# Altium PCB 滑板车模块-20718.PcbDoc
Units mil, origin at the board's own origin, x right, y up, seen from the top; angles counter-clockwise.
Board outline 2150 x 1000 mil, 2 copper layers (Top Layer, Bottom Layer); 31 components, 25 nets, 107 pads, 132 vias.
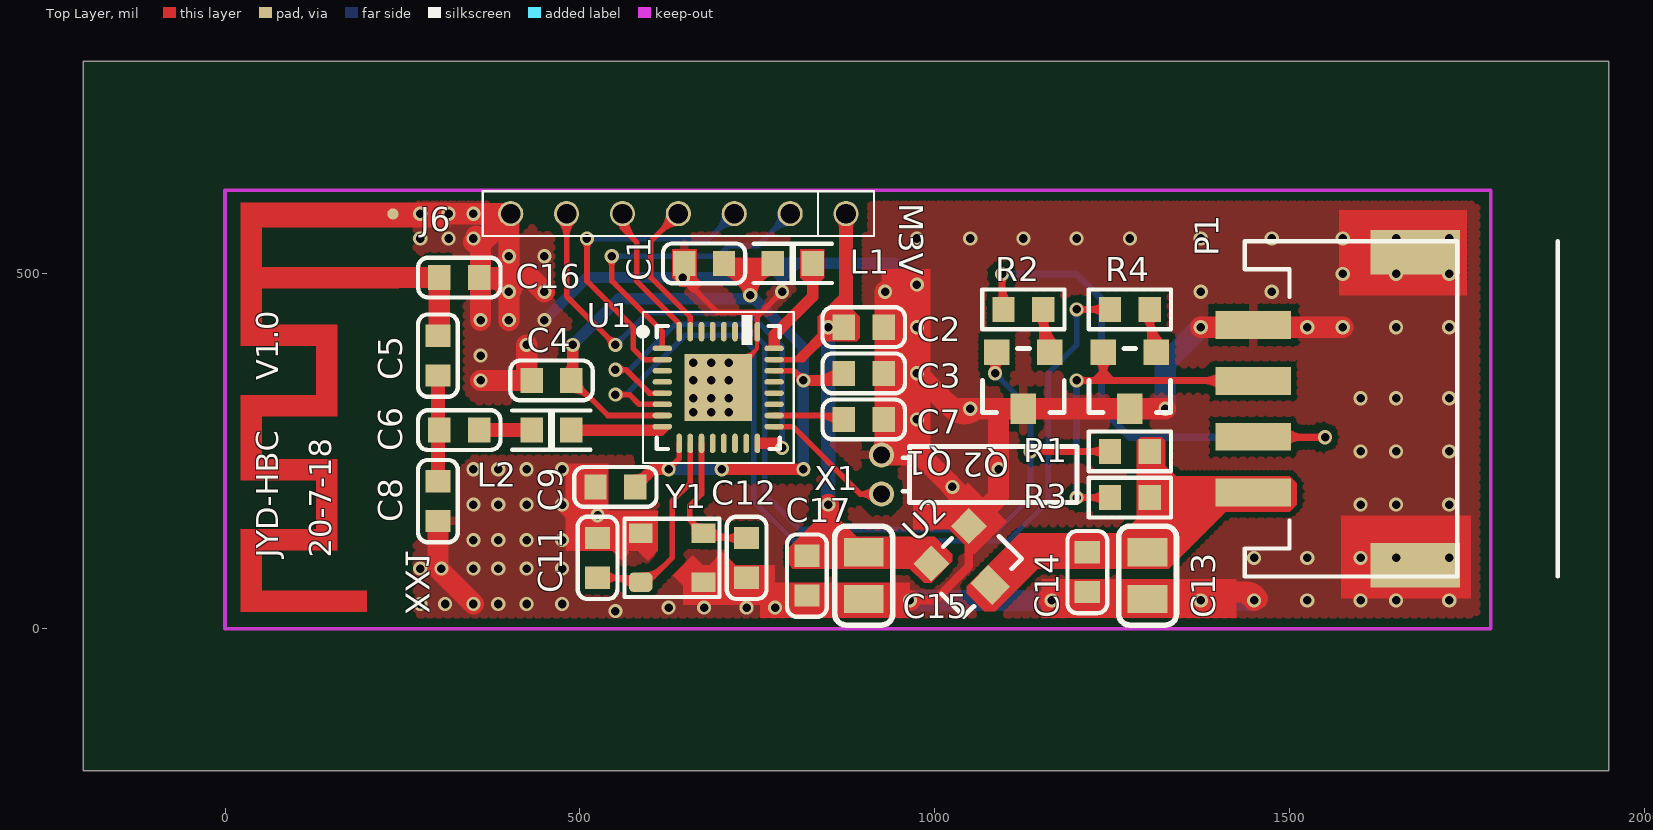
[diagram p0: Top Layer view]
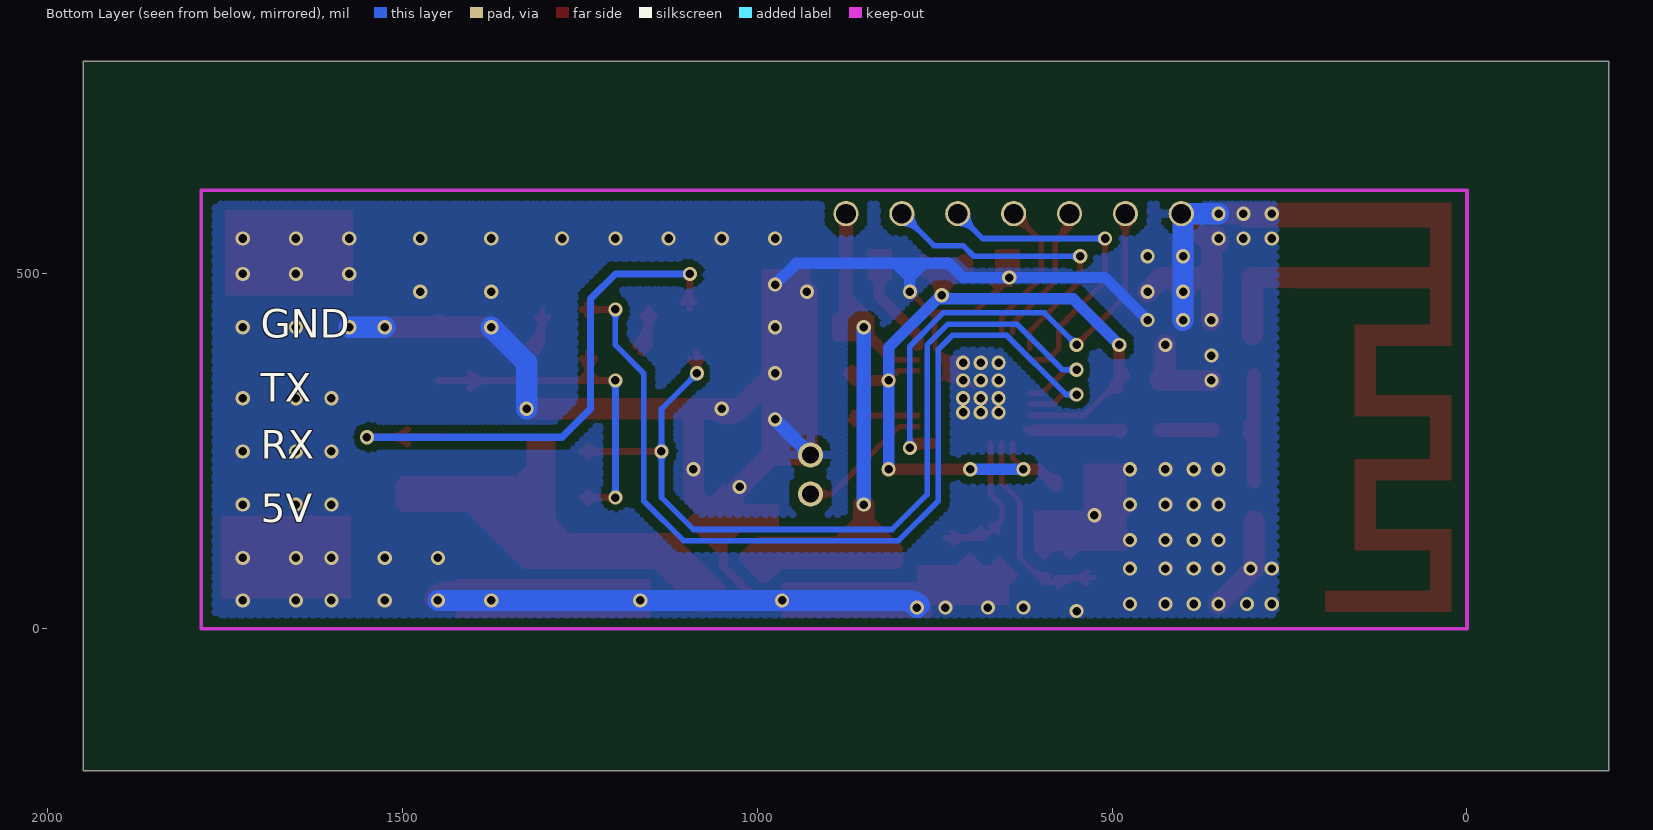
[diagram p1: Bottom Layer view, seen from below]
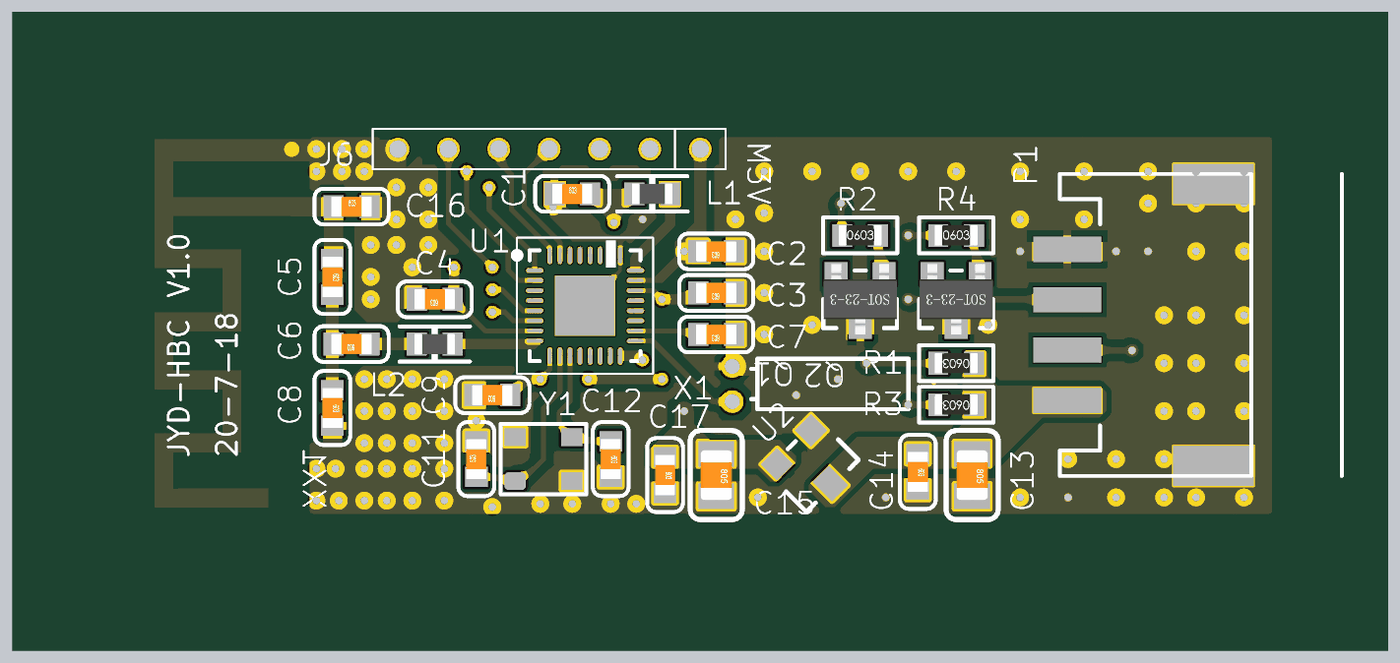
[diagram p2: 3D render of the assembled board from above, using the file's embedded part models]

## Layer stack, top to bottom
Top Layer: signal copper 1.4
Dielectric: dielectric 12.6, FR-4, Dk 4.8
Bottom Layer: signal copper 1.4

## Board outline
-200,800 -200,-200 1950,-200 1950,800

## Design rules (kind name [scope] priority, off if disabled: settings)
Clearance Clearance_1 [(IsWire)or(IsThruPin)or(IsFill)or(InPolygon)or(IsKeepOut) vs (InPolygon)or(IsKeepOut)] p1: gap=12
Clearance [All] p2: gap=7.87
ComponentClearance [All] p1: gap=0 collisioncheckmode=3 verticalgap=0 showdistances=FALSE
DiffPairsRouting [All] p1: maxlimit=80 minlimit=6 mostfreqgap=7.87 maxuncoupledlength=500
FabricationTestpoint [(IsPad And (OnTopLayer Or OnBottomLayer))] p1: side=3 testpointundercomponent=TRUE minsize=40 maxsize=100 preferedsize=60 minholesize=0 maxholesize=40 preferedholesize=32 testpointgrid=1 allowsidetop=TRUE allowsidebottom=TRUE usegrid=TRUE gridtolerance=0.01
HoleToHoleClearance [All] p1: gap=0 allowstackedmicrovias=TRUE
MinimumSolderMaskSliver [All] p1: minsoldermaskwidth=0
PolygonConnect PolygonConnect_1 [isvia] p1: connectstyle=Direct reliefconductorwidth=10 reliefentries=4 polygonreliefangle="90 Angle" airgapwidth=10
PolygonConnect [All] p2: connectstyle=Relief reliefconductorwidth=12 reliefentries=4 polygonreliefangle="90 Angle" airgapwidth=10
RoutingVias [All] p1: holewidth=11.81 width=19.68 viastyle="Through Hole" minholewidth=11.81 minwidth=19.68 maxholewidth=11.81 maxwidth=19.68
SilkToSilkClearance [All] p1: silktosilkclearance=0
SilkToSolderMaskClearance [IsPad] p1: minsilkscreentomaskgap=0 clearancetoexposedcopper=TRUE
SolderMaskExpansion [All] p1: expansion=4
Width [All] p1: maxlimit=80 minlimit=5 preferedwidth=10
21 further rules are at their usual default settings.

## Classes and differential pairs
differential pair TXRX: +TXD -RXD
differential pair TAX: +NetC12_1 -NetC11_1

## Components (designator, comment, footprint, x,y, rotation, side; value= is the part's Value field where it differs from the comment)
C1 "4.7uF/10V" 0603C 675,515 r0 top
C2 "1uF/10V" 0603C 900,425 r180 top
C3 "1uF/6.3" 0603C 900,360 r180 top
C4 "1uF/6.3V" 0603C 460,350 r180 top
C5 "0R" 0603C 300,385 r270 top
C6 "1pF" 0603C 330,280 r180 top
C7 "100nF" 0603C 900,295 r180 top
C8 "1.0pF/NP" 0603C 300,180 r270 top
C9 "100nF" 0603C 550,200 r180 top
C11 "5.6pF" 0603C 525,100 r90 top
C12 "5.6pF" 0603C 735,100 r270 top
C13 "47uF/16V" 0805C 1300,75 r270 top
C14 "100nF" 0603C 1215,80 r270 top
C15 "47uF/10V" 0805C 900,75 r270 top
C16 "NP" 0603C 330,495 r0 top
C17 "100nF" LC-0603_C 820,75 r270 top
J6 "7P" 7P-2.0MM 875,585 r180 top
L1 "2.2uH" 0603L 800,515 r180 top
L2 "2nH" 0603L 460,280 r0 top
P1 "Header 4" S4B-PH-SM3-TB 1500,310 r90 top
Q1 "2N3906" SOT-23-3 1125,350 r180 top
Q2 "2N3906" SOT-23-3 1275,350 r180 top
R1 "20K" 0603R 1275,250 r180 top
R2 "10K" 0603R 1125,450 r0 top
R3 "10K" 0603R 1275,185 r180 top
R4 "20K" 0603R 1275,450 r0 top
U1 "BK3432" QFN32_4*4*0.4 695,340 r0 top
U2 "HT7533-1" SOT-23-3L 1050,90 r225 top
X1 "32.768KHZ" 晶振-9 925,245 r270 top
XX1 "TIANX" ANT_L_TYPEA_MIRROR 240,495 r270 top
Y1 "16MHz" SMT-3225 630,100 r0 top

## Footprints (in the part's own frame and the unit in brackets; to place one, negate y for a bottom-side part, rotate by r counter-clockwise, add the part's x,y. Pads: shape width x height; smd on the part's side, far side on the other; paste and mask are expansions set on the pad)
7P-2.0MM [mm]
  round 0.9 hole 0.7 mask+0.05: 1(0,0) 2(2,0) 3(4,0) 4(6,0) 5(8,0) 6(10,0) 7(12,0)
  silkscreen extent -1,-0.8 13,0.8
0603C [mm]
  rect 0.8x0.9 smd: 1(-0.711,0) 2(0.711,0)
  silkscreen extent -1.47,-0.71 1.47,0.71, body extent -0.8,-0.4 0.8,0.4, height 0.3
0603L [mm]
  rect 0.8x0.9 smd: 1(-0.711,0) 2(0.711,0)
  silkscreen extent -1.4,-0.7 1.4,0.7, body extent -0.82,-0.41 0.83,0.41, height 0.46
0603R [mm]
  rect 0.8x0.9 smd: 1(-0.711,0) 2(0.711,0)
  silkscreen extent -1.47,-0.71 1.47,0.71, body extent -0.85,-0.4 0.85,0.4, height 0.56
0805C [mil]
  rect 40x56 smd: 1(-33,0) 2(33,0)
  silkscreen extent -70,-41 70,41, body extent -39,-25 39,25, height 30
ANT_L_TYPEA_MIRROR [mm]
  round 0.4 smd paste-0.2: 2(-2.278,-0.087)
  Top Layer region: 0.377,0.114 -0.377,0.114 -0.377,-4.786 -1.796,-4.786 -1.796,0.114 -2.677,0.114 -2.677,-5.54 2.45,-5.54 2.45,-2.84 4.207,-2.84 4.207,-5.54 7.261,-5.54 7.261,-2.84 9.007,-2.84 9.007,-5.54 11.961,-5.54 11.963,-1.016 11.201,-1.016 11.207,-4.786 9.761,-4.786 9.761,-2.086 6.507,-2.086 6.507,-4.786 4.961,-4.786 4.961,-2.086 1.696,-2.086 1.696,-4.786 0.377,-4.786
LC-0603_C [mm]
  rect 0.8x0.9 smd: 1(-0.711,0) 2(0.711,0)
  silkscreen extent -1.47,-0.71 1.47,0.71, body extent -0.8,-0.4 0.8,0.4, height 0.3
QFN32_4*4*0.4 [mm]
  rect 2.4x2.4 smd paste-0.025 mask+0.051: 0(0,0)
  oval 0.7x0.2 smd paste-0.025 mask+0.051: 1(-2,1.4) 2(-2,1) 3(-2,0.6) 4(-2,0.2) 5(-2,-0.2) 6(-2,-0.6) 7(-2,-1) 8(-2,-1.4) 17(2,-1.4) 18(2,-1) 19(2,-0.6) 20(2,-0.2) 21(2,0.2) 22(2,0.6) 23(2,1) 24(2,1.4)
  oval 0.2x0.7 smd paste-0.025 mask+0.051: 9(-1.4,-2) 10(-1,-2) 11(-0.6,-2) 12(-0.2,-2) 13(0.2,-2) 14(0.6,-2) 15(1,-2) 16(1.4,-2) 25(1.4,2) 27(0.6,2) 28(0.2,2) 29(-0.2,2) 30(-0.6,2) 31(-1,2) 32(-1.4,2)
  oval 0.2x0.7 on Top Overlay paste-0.025 mask+0.051: 26(1,2)
  silkscreen extent -2.82,-2.7 2.7,2.7
S4B-PH-SM3-TB [mm]
  rect 1x2.7 smd mask+0.05: 1(-3,1.3) 2(-1,1.3) 3(1,1.3) 4(3,1.3)
  rect 1.6x3.2 smd mask+0.05: A(-5.6,-4.5) B(5.6,-4.5)
  silkscreen extent -6,-9.6 6,1.6
SMT-3225 [mm]
  rrect50% 0.85x0.7 smd: 1(-1.125,-0.875)
  rect 0.85x0.7 smd: 2(1.125,-0.875) 3(1.125,0.875) 4(-1.125,0.875)
  silkscreen extent -1.7,-1.4 1.7,1.4
SOT-23-3 [mil]
  rect 36x36 smd: 1(-37.4,-40) 2(37.4,-40)
  rect 36x43.31 smd: 3(0,40)
  silkscreen extent -57,-45 58,45, body extent -57,-55 57,55, height 47
SOT-23-3L [mil]
  rect 36x36 smd: 1(-37.4,-40) 2(37.4,-40)
  rect 36x43.31 smd: 3(0,40)
  silkscreen extent -57,-45 58,45
晶振-9 [mm]
  round 0.9 hole 0.6: 1(0,0) 2(1.4,0)
  rect 0x0 smd: 3(0.635,8)
  silkscreen extent -0.3,0.76 1.7,7

## Part data
C1 C2 C3 C4 C5 C6 C7 C8 C9 C11 C12 C16: library part CAP0603
C13 C15: library part CAP-P, "Capacitor, tolerance ±20%"
C14: library part "CAP NP"
C17: library part CAP-NP, "Capacitor, Ceramic"
L1 L2: "Power Inductor, 4.7uH, 0.7A, 260mR DCR"
P1: "Header, 4-Pin"
Q1 Q2: "PNP General Purpose Amplifier"
R1 R2 R3 R4: library part Res1, "Resistor"
U2: library part XC6206P302M
X1: "Crystal, 24MHz, HC49/US SMD, Fundamental, 18pF, Tol. ?0ppm, Stab. ?0ppm"
Y1: library part OSCILATOR_0

## Via types
v1: diameter 20, hole 12, Top Layer to Bottom Layer, 116 vias
v2: diameter 20, hole 12, Top Layer to Bottom Layer, tented both sides, 16 vias

## Nets (pads, with @x,y where several pads share a name; then routed paths per layer and width w, separated by ;. In a path a pad name is that pad's centre, name@x,y a point inside that pad or via, vN(x,y) a via of type N, cw(c..) or ccw(c..) an arc to the next point about the centre after c; other vN are vias at no path point)
DC5V: C13.1 C14.1 P1.1 R1.1 R3.1 U2.3 | length 665.6
  Top Layer w20: C13.1@1292.93,115.07 ccw(c1268.62,139.38) 1303,139.38 ; C13.1@1303,111 R3.1 R1.1
  Top Layer w30: U2.3 1124.57,108 C14.1 C13.1 ; C13.1@1303,111 C13.1 ; C13.1@1308,108 C13.1 ; C13.1@1308,113 ccw(c1308,149.21) 1333.61,123.61 ; 1384.37,174.37 cw(c1415.35,143.39) P1.1@1415.35,187.2 ; P1.1 1401.89,191.89 1318,108 C13.1
GND: C1.1 C2.1 C3.1 C4.2 C5.1 C7.1 C8.2 C9.2 C11.2 C12.2 C13.2 C14.2 C15.2 C16.1 C16.2 C17.2 J6.7 P1.4 P1.A P1.B Q1.3 Q2.3 U1.0 U1.25 U2.1 X1.1 XX1.2 Y1.2 Y1.4 | length 6631.5
  Top Layer w5: U1.0@700.66,345.66 cw(c706.51,339.82) U1.0@709.19,347.64 ; U1.0@700.73,345.73 ccw(c696.46,350) U1.0@702.5,350 ; U1.0@702.8,368.7 ccw(c710.5,397.07) 731.29,376.29 ccw(c752.07,355.5) U1.0@723.7,347.8 ; U1.0@704.11,373.53 ccw(c713.11,406.66) 737.39,382.39 ccw(c761.66,358.11) U1.0@728.53,349.11 ; U1.0@705.42,378.35 ccw(c715.71,416.26) 743.48,388.48 ccw(c771.26,360.71) U1.0@733.35,350.42 ; U1.0@706.73,383.18 ccw(c718.32,425.85) 749.58,394.58 ; U1.0@707.56,342.91 ccw(c703.61,331.39) U1.0 749.59,394.59 ; U1.0@708.23,373.24 ccw(c719.26,384.19) U1.0@719.2,368.65 ; U1.0@708.24,376.77 cw(c723.64,361.27) U1.0@723.71,383.12 ; U1.0@710,357.5 ccw(c710,363.54) U1.0@714.27,359.27 ; U1.0@711.76,373.23 cw(c724.05,360.86) U1.0@724.11,378.29 ; U1.0@712.5,350 cw(c730.61,350) U1.0@717.8,362.8 ; U1.0@715.32,380.29 ccw(c720.08,385.01) U1.0@720.06,378.3 ; U1.0@717.5,350 cw(c747.68,350) U1.0@726.34,371.34 ; U1.0@738.18,351.73 cw(c780.85,363.32) 749.58,394.58 ; 749.59,404.14 cw(c754.87,404.14) U1.25@751.13,407.88 ; U1.25 749.59,418.21 749.59,394.59
  Top Layer w7.87: v1(645,495) 694.11,445.89 745,445.89 ; U1.25@750.12,406.48 U1.25@750.12,417.67 ; U1.25 750.12,440.12 ; v2@778.94,475 cw(c764.3,475) 774.65,464.65 cw(c785,454.3) v2@785,468.94 ; v2(785,475) 755.89,445.89 ; 745,445.89 750.12,440.78 750.12,440.12 ; 745,445.89 755.89,445.89 ; 750.12,440.12 755.89,445.89
  Top Layer w12: v1(965,40) 1000,40 1048.16,88.16 U2.1 ; U2.1@1039.68,136.25 cw(c1019.19,115.76) 1048.16,115.76 cw(c1077.13,115.76) U2.1@1056.65,136.25
  Top Layer w19.68: v1(645,495) 645,513 C1.1 ; X1.1 X1.1@928,248 ; C7.1 930,295 v1(975,295) ; C3.1 930,360 v1(975,360) ; C2.1 930,425 v1(975,425)
  Top Layer w20: v1(475,175) 515.55,134.45 C11.2@522,134.45 ; 522,144.37 ccw(c539.4,144.37) C11.2@527.1,132.06 ; C9.2 C11.2@522,134.45 ; C11.2 522,131 C11.2@522,134.45 ; C11.2@531.03,123.94 cw(c556.41,98.55) 556.41,134.45 ; Y1.4 C11.2@522,134.45 ; v1(675,30) 675,64.84 Y1.2 C12.2@728.55,65.55 ; 703.59,65.55 ccw(c703.59,101.45) C12.2@728.97,76.06 ; v1(735,30) C12.2
  Top Layer w30: 235,495 C16.1 C5.1@302,415 ; 246.56,584.67 314.67,584.67 v1(315,585) v1(350,585) J6.7 J6.7@400,582.44 ; C8.2 300,85 v1(350,35) ; v1@350,545 ccw(c350,575.32) 371.44,553.88 ; C16.2 C16.2@360,495 ; v1(360,350) C4.2 ; v1(360,435) C16.2@360,495 ; C16.2@363.79,495 cw(c363.79,438.79) v1@403.54,478.54 ; v1@396,478 cw(c430,452.5) 430,495 ; v1(400,435) v1(400,475) 400,495 ; C4.2@425,357 v1(425,400) ; 425,370.67 ccw(c450.71,370.67) C4.2@432.53,352.5 ; v1(450,475) 430,495 ; C12.2 775,32 v1(775,30) ; v1@771,33 cw(c785,22.5) 785,40 v1(965,40) ; v1@771.46,33.54 cw(c787.07,17.93) 787.07,40 ; 799.33,40 ccw(c799.33,65.71) C17.2@817.5,47.53 ; C17.2@822.5,47.53 ccw(c840.67,65.71) 840.67,40 ; X1.1@923.08,246.92 ccw(c906.37,263.63) 930,263.63 ; X1.1 980,245 v2(1025,200) 1064.22,160.78 ; X1.1@928,248 930,250 930,295 930,360 930,425 v1(930,475) ; v1(975,360) 1025,310 ; 1015.86,319.14 ccw(c1050,353.28) v1@1050,305 ; v2@1020.34,204.66 cw(c960.41,144.73) U2.1@1045.16,144.73 ; U2.1 1064.22,160.78 ; v1@1052.22,305.52 cw(c1041.73,326.73) 1025,310 ; v2@1160.65,42.46 cw(c1177,33.22) 1177,52 ; v2@1161.46,43.54 cw(c1181.9,23.1) 1181.9,52 ; v2(1165,40) 1177,52 ; 1255.79,52 cw(c1255.79,5.79) C13.2@1288.46,38.46 ; C13.2@1311.54,38.46 cw(c1344.21,5.79) 1344.21,52 ; v1(1325,310) Q2.3 Q1.3 1090,310 ; 1358.1,52 cw(c1358.1,23.1) v1@1378.54,43.54 ; v1@1371.46,43.54 cw(c1391.9,23.1) 1391.9,52 ; v2(1375,425) P1.4@1451.93,425 ; 1433.1,52 cw(c1433.1,23.1) v2@1453.54,43.54 ; P1.4 P1.4@1451.93,425 ; v2(1450,40) 1438,52 ; v2@1454.35,42.46 ccw(c1438,33.22) 1438,52 ; v2(1575,425) v2(1525,425) P1.4@1451.93,425 ; C16.2@360,495 400,495 ; C16.2@360,495 360,542.44 J6.7@400,582.44 ; 400,495 430,495 ; 400,495 v1(400,525) J6.7@400,582.44 ; 1025,310 v1(1050,310) 1090,310 ; 1064.22,160.78 1090,186.57 v2(1090,225) 1090,310 ; 1177,52 C14.2 1438,52 ; v1@353.54,553.54 cw(c337.93,537.93) 360,537.93 ccw(c337.93,537.93) v1@353.54,553.54
  Bottom Layer w16: v1(450,435) 510,495 v1(645,495) 710,495 730,515 765,515 ; v2(785,475) 785,495 ; v1(975,485) 945,515 805,515 ; 765,515 785,515 ; 765,515 785,495 ; 785,495 785,515 ; 785,495 805,515 ; 785,515 805,515
  Bottom Layer w19.68: X1.1 v1(975,295)
  Bottom Layer w30: v1(350,585) J6.7 400,582.44 v1(400,525) v1(400,475) v1(400,435) ; v1@771.46,33.54 cw(c787.07,17.93) 787.07,40 ; v1(775,30) 785,40 v1(965,40) v2(1165,40) v1(1375,40) v2(1450,40) ; v1(1325,310) 1325,375 v2(1375,425) ; v2(1525,425) v2(1575,425)
  other v1: 550,25 625,30 275,35 310,35 385,35 425,35 475,35 1525,40 1600,40 1650,40 1725,40 275,85 305,85 350,85 385,85 425,85 475,85 1450,100 1525,100 1600,100 1650,100 1725,100 350,125 385,125 425,125 475,125 525,160 350,175 385,175 425,175 1600,175 1650,175 1725,175 350,225 385,225 425,225 475,225 1600,250 1650,250 1725,250 660,305 685,305 710,305 660,325 685,325 710,325 1600,325 1650,325 1725,325 660,350 685,350 710,350 660,375 685,375 710,375 360,385 1650,425 1725,425 1375,475 1475,475 1575,500 1650,500 1725,500 450,525 275,550 315,550 350,550 975,550 1050,550 1125,550 1200,550 1275,550 1375,550 1475,550 1575,550 1650,550 1725,550 275,585
M3V3: C2.2 C15.1 C17.1 J6.1 U1.23 U2.2 | length 1231.2
  Top Layer w7.87: U1.23 804.37,379.37 ; 832.58,397.58 ccw(c805.16,425) 843.94,425 cw(c829.3,425) 839.65,414.65 cw(c850,404.3) v1@850,418.94 ; 846.02,411.02 ccw(c832.04,425) v1@851.81,425 ; 804.37,379.37 814.37,379.37 850,415 v1(850,425) 804.37,379.37
  Top Layer w20: v1(850,425) C2.2 875,428 J6.1 ; C2.2@867.94,431.03 ccw(c850.88,448.09) 875,448.09 ; J6.1@869.54,579.54 cw(c856.37,566.37) 875,566.37 cw(c893.63,566.37) J6.1@880.46,579.54
  Top Layer w30: C17.1@821.94,103.75 ccw(c820.72,133) 850,133 ; v2(850,175) 850,140 ; 866.39,123.61 ccw(c892,149.21) C15.1@892,113 ; 867.86,103 ccw(c867.86,132.14) C15.1@888.46,111.54 ; C15.1@887,113 C15.1@890,113 ; C15.1 882,108 850,140 ; C15.1@911.54,111.54 ccw(c932.14,132.14) 932.14,103 ; 961.08,103 cw(c961.08,57.64) U2.2@993.15,89.72 ; U2.2 984.11,103 850,103 ; 850,103 850,133 ; 850,103 C17.1 850,133 ; 850,133 850,140
  Bottom Layer w20: v2(850,175) v1(850,425)
NetC5_1: 
NetC5_2: C5.2 C6.2 C8.1 | length 181.5
  Top Layer w20: C8.1 C5.2 ; 300,259.33 cw(c320.71,259.33) C6.2@306.06,273.97 ; 300,300.67 ccw(c320.71,300.67) C6.2@306.06,286.03
NetC6_1: C6.1 L2.1 | length 74
  Top Layer w19.68: C6.1 L2.1
NetC7_2: C7.2 U1.18 | length 154.7
  Top Layer w7.87: U1.18 C7.2@866.37,300.63 ; 834.65,300.63 cw(c834.65,259.62) C7.2@863.65,288.62 ; 852.32,300.63 ccw(c852.32,316.64) C7.2@863.65,305.32 ; 853.66,300.63 cw(c853.66,278.62) C7.2@869.22,294.18
NetC11_1: C11.1 U1.10 Y1.1 | length 444.1
  Top Layer w7.87: C11.1 579.26,72 Y1.1 595.55,65.55 630,100 630,180 655.63,205.63 U1.10 ; C11.1@535.32,63.65 cw(c555.48,43.49) 555.48,72 cw(c555.48,100.51) C11.1@535.32,80.35 ; 543.43,72 cw(c543.43,26.22) Y1.1@575.8,58.59 ; 562.43,72 cw(c562.43,45.23) Y1.1@581.36,64.16 ; Y1.1@588.66,67.52 ccw(c588.66,88.91) 603.78,73.78 ; Y1.1@588.66,75.39 ccw(c588.66,115.79) 617.23,87.23
NetC12_1: C12.1 U1.11 Y1.3 | length 340.3
  Top Layer w7.87: 659.58,149.16 ccw(c671.34,160.92) Y1.3@671.34,144.29 ; Y1.3@661.54,135.36 ccw(c638.44,137.5) 654.84,153.9 ; U1.11 671.38,189.85 654.84,173.32 654.84,153.9 ; Y1.3@678.64,135.84 ccw(c697.57,154.77) 697.57,128 ; Y1.3@684.2,141.41 ccw(c716.57,173.78) 716.57,128 ; C12.1@724.68,119.65 ccw(c704.52,99.49) 704.52,128 ccw(c704.52,156.51) C12.1@724.68,136.35 ; C12.1 680.74,128 Y1.3 654.84,153.9
NetL1_1: L1.1 U1.24 | length 167.7
  Top Layer w16: 773.74,399.18 773.74,413.74 828,468 L1.1 ; L1.1@822.52,507.55 cw(c809.29,494.33) 828,494.33 cw(c846.71,494.33) L1.1@833.48,507.55
NetL2_2: L2.2 U1.8 | length 122.5
  Top Layer w16: L2.2@489.1,280 610,280
  Top Layer w19.68: L2.2 L2.2@489.1,278.9
NetQ1_1: Q1.1 R2.2 | length 161.8
  Top Layer w11.81: R2.2@1146.04,441.07 cw(c1129.24,424.27) 1153,424.27 cw(c1176.76,424.27) R2.2@1159.96,441.07 ; Q1.1@1153,399.4 R2.2 ; 1153,413.38 ccw(c1185.78,413.38) Q1.1@1162.6,390.2 ; R2.2@1153,441.9 ccw(c1214.3,441.9) Q1.1@1170.95,398.55
NetQ2_1: Q2.1 R4.2 | length 206.2
  Top Layer w7.87: R4.2@1294.65,439.68 cw(c1274.49,419.52) 1303,419.52 cw(c1331.51,419.52) R4.2@1311.35,439.68 ; Q2.1@1303,399.4 R4.2 ; 1303,408.63 ccw(c1331.03,408.63) Q2.1@1311.21,388.81 ; 1303,427.64 ccw(c1350.04,427.64) Q2.1@1316.78,394.38 ; R4.2@1303,446.65 ccw(c1369.05,446.65) Q2.1@1322.35,399.94
NetU1_17: U1.17 X1.2 | length 234.7
  Top Layer w7.87: U1.17 800.12,284.88 895.12,189.88 ; X1.2@914.52,180.93 ccw(c895.12,164.38) 895.12,189.88 ; X1.2@914.52,198.83 cw(c895.12,215.38) 895.12,189.88 ; X1.2 895.12,189.88
P03: U1.3
P04: J6.3 U1.2 | length 574.6
  Top Layer w7.87: v1@505.71,545.71 cw(c495.36,535.36) 510,535.36 cw(c524.64,535.36) v1@514.29,545.71 ; v1(510,550) 510,490 575,425 575,395 590.63,379.37 U1.2
  Bottom Layer w7.87: v1(510,550) 682.52,550 ; v1@514.29,545.71 cw(c524.64,535.36) 524.64,550 cw(c524.64,564.64) v1@514.29,554.29 ; 700,567.48 682.52,550 ; J6.3@703.74,585 cw(c670.47,585) 694,561.48 cw(c717.52,537.95) J6.3@717.52,571.22 ; J6.3 682.52,550
P05: J6.2 U1.1 | length 533.8
  Top Layer w7.87: v1@540.71,520.71 cw(c530.36,510.36) 545,510.36 cw(c559.64,510.36) v1@549.29,520.71 ; v1(545,525) 545,490 616.26,418.74 U1.1
  Bottom Layer w7.87: v1(545,525) 695,525 710,540 751.26,540 J6.2 ; v1@549.29,520.71 cw(c559.64,510.36) 559.64,525 cw(c559.64,539.64) v1@549.29,529.29 ; J6.2@782.48,585 cw(c749.21,585) 772.74,561.48 cw(c796.26,537.95) J6.2@796.26,571.22
P06: J6.5 U1.32 | length 285.5
  Top Layer w7.87: J6.5@555.11,572.13 cw(c552.36,564.96) 560.04,564.96 ; J6.5@558.09,585.26 ccw(c590.83,580.89) 567.47,557.53 ; J6.5 560.04,564.96 ; J6.5@564.97,572.13 ccw(c567.72,564.96) 560.04,564.96 ; J6.5@565.89,584.22 ccw(c610.7,578.23) 575.24,550.19 ; U1.32@639.88,417.67 639.88,430.12 580,490 580,545 560.04,564.96
P07: J6.4 U1.31 | length 258.7
  Top Layer w7.87: J6.4@625,585 cw(c591.73,585) 615.26,561.48 cw(c638.78,537.95) J6.4@638.78,571.22 ; J6.4 600,546.22 600,495 655.63,439.37 U1.31@655.63,417.67
RSTN: J6.6 U1.16 | length 805.1
  Top Layer w7.87: J6.6@471.56,575.26 cw(c448.03,551.73) 481.3,551.73 cw(c514.57,551.73) J6.6@491.04,575.26 ; J6.6 481.3,468.7 v1(550,400) ; v1@543.94,400 ccw(c529.3,400) 539.65,410.35 ccw(c550,420.7) v1@550,406.06
  Top Layer w16: 754.18,261.26 778.74,261.26 v1(785,255) ; 765.06,261.26 cw(c765.06,235.06) v1@783.59,253.59
  Bottom Layer w7.87: v1(550,400) 595.19,445.19 738.05,445.19 785,398.23 v1(785,255) ; v1@550,406.06 ccw(c550,420.7) 560.35,410.35 ccw(c570.7,400) v1@556.06,400 ; v1@780.71,259.29 ccw(c770.36,269.64) 785,269.64 ccw(c799.64,269.64) v1@789.29,259.29
RXD: Q1.2 R1.2 U1.5 | length 1557.4
  Top Layer w7.87: v1(550,365) 565,365 597.87,332.13 U1.5 ; v1@554.29,360.71 cw(c564.64,350.36) 564.64,365 cw(c564.64,379.64) v1@554.29,369.29 ; Q1.2@1085,387.4 Q1.2
  Top Layer w10: Q1.2@1078.41,380.81 cw(c1062.49,364.89) v2@1085,364.89 ; v2@1080.79,362.7 ccw(c1068.85,370.36) Q1.2@1082.55,374.03 ; v2@1081.46,363.54 ccw(c1072.93,372.07) 1085,372.07 ccw(c1097.07,372.07) v2@1088.54,363.54 ; v2@1082.5,364.33 ccw(c1076.42,374.87) 1088.17,371.72 ; v2@1085,359.89 cw(c1108.86,359.89) Q1.2@1095.1,379.38 ; v2(1085,360) Q1.2@1085,387.4 ; 1088.13,371.59 ccw(c1099.7,368.49) v2@1089.33,362.5 ; v2(1135,250) R1.2 ; v2@1138.54,246.46 cw(c1147.07,237.93) 1147.07,250 cw(c1147.07,262.07) v2@1138.54,253.54 ; R1.2@1239.4,242.4 ccw(c1221.05,224.05) 1221.05,250 ccw(c1221.05,275.95) R1.2@1239.4,257.6
  Bottom Layer w7.87: v1(550,365) 570,365 634.44,429.44 731.52,429.44 760.75,400.22 760.75,189.25 810,140 1090,140 1135,185 v2(1135,250) 1135,310 v2(1085,360) ; v1@554.29,360.71 cw(c564.64,350.36) 564.64,365 cw(c564.64,379.64) v1@554.29,369.29 ; v2@1085,353.94 cw(c1085,339.3) 1095.35,349.65 cw(c1105.7,360) v2@1091.06,360 ; v2@1130.71,245.71 cw(c1120.36,235.36) 1135,235.36 cw(c1149.64,235.36) v2@1139.29,245.71 ; v2@1130.71,254.29 ccw(c1120.36,264.64) 1135,264.64 ccw(c1149.64,264.64) v2@1139.29,254.29
TXD: R4.1 U1.6 | length 1447
  Top Layer w7.87: v1(550,330) 570,330 583.62,316.38 U1.6 ; v1@554.29,325.71 cw(c564.64,315.36) 564.64,330 cw(c564.64,344.64) v1@554.29,334.29
  Top Layer w10: v2(1200,450) R4.1 ; v2@1203.54,446.46 cw(c1212.07,437.93) 1212.07,450 cw(c1212.07,462.07) v2@1203.54,453.54 ; R4.1@1239.4,442.4 ccw(c1221.05,424.05) 1221.05,450 ccw(c1221.05,475.95) R4.1@1239.4,457.6
  Bottom Layer w7.87: v1(550,330) 565,330 648.69,413.69 725,413.69 745,393.69 745,180 800.75,124.25 1104.25,124.25 1160,180 1160,360 1200,400 v2(1200,450) ; v1@554.29,325.71 cw(c564.64,315.36) 564.64,330 cw(c564.64,344.64) v1@554.29,334.29 ; v2@1195.71,445.71 cw(c1185.36,435.36) 1200,435.36 cw(c1214.64,435.36) v2@1204.29,445.71
UART1_RXD: P1.3 Q2.2 R3.2 | length 758
  Top Layer w10: v2(1200,185) R3.2 ; v2(1200,350) 1225,350 ; v2@1203.54,181.46 cw(c1212.07,172.93) 1212.07,185 cw(c1212.07,197.07) v2@1203.54,188.54 ; v2@1203.54,346.46 cw(c1212.07,337.93) 1212.07,350 cw(c1212.07,362.07) v2@1203.54,353.54 ; Q2.2@1228.41,380.81 cw(c1206.21,358.62) 1237.6,358.62 cw(c1268.98,358.62) Q2.2@1246.79,380.81 ; Q2.2 1237.6,362.6 ; R3.2@1239.4,177.4 ccw(c1221.05,159.05) 1221.05,185 ccw(c1221.05,210.95) R3.2@1239.4,192.6 ; 1378.38,350 cw(c1378.38,312.4) P1.3@1404.97,338.99 ; 1381.42,350 ccw(c1381.42,383.3) P1.3@1404.97,359.75 ; P1.3 1448.19,350 1250,350 ; 1225,350 1237.6,362.6 ; 1225,350 1237.6,350 ; 1237.6,350 1237.6,362.4 ; 1237.6,350 1250,350 ; 1237.6,362.4 1250,350 ; 1237.6,362.4 1237.6,362.6
  Bottom Layer w10: v2@1196.46,188.54 ccw(c1187.93,197.07) 1200,197.07 ccw(c1212.07,197.07) v2@1203.54,188.54 ; v2@1196.46,346.46 cw(c1187.93,337.93) 1200,337.93 cw(c1212.07,337.93) v2@1203.54,346.46 ; v2(1200,185) v2(1200,350)
UART1_TXD: P1.2 R2.1 | length 962.8
  Top Layer w10: R2.1@1089.4,459.57 ccw(c1075.88,473.09) 1095,473.09 ; v2@1091.46,496.46 cw(c1082.93,487.93) 1095,487.93 cw(c1107.07,487.93) v2@1098.54,496.46 ; R2.1@1095,452 v2(1095,500) ; 1095,482.74 ccw(c1127.78,482.74) R2.1@1104.6,459.57 ; P1.2 1449.45,270 v2(1550,270) ; P1.2@1492.67,260.25 cw(c1516.22,236.7) 1516.22,270 ; P1.2@1492.67,281.01 ccw(c1519.26,307.6) 1519.26,270 ; v2@1546.46,266.46 ccw(c1537.93,257.93) 1537.93,270 ccw(c1537.93,282.07) v2@1546.46,273.54
  Bottom Layer w10: v2(1095,500) 1200,500 1235,465 1235,310 1275,270 v2(1550,270) ; v2@1098.54,496.46 cw(c1107.07,487.93) 1107.07,500 cw(c1107.07,512.07) v2@1098.54,503.54 ; v2@1546.46,266.46 ccw(c1537.93,257.93) 1537.93,270 ccw(c1537.93,282.07) v2@1546.46,273.54
VD1V5: C1.2 C3.2 C4.1 C9.1 L1.2 U1.7 U1.9 U1.22 | length 1858.9
  Top Layer w7.87: C4.1@488,336.22 cw(c488,298.13) 514.94,325.06 ; C4.1@488,344.09 cw(c488,325.01) C4.1@501.5,338.5 ; C4.1 490,350 539.37,300.63 U1.7 ; C4.1@499.81,348.03 ccw(c518.74,348.03) 505.36,334.64 ; v1(625,225) 639.88,239.88 U1.9 ; v1@625,231.06 ccw(c625,245.7) 635.35,235.35 ccw(c645.7,225) v1@631.06,225 ; U1.22 801.38,363.62 v1(815,350) ; v1@808.94,350 ccw(c794.3,350) 804.65,360.35 ccw(c815,370.7) v1@815,356.06
  Top Layer w11.81: C4.1 C4.1@490,352
  Top Layer w16: C4.1@482.52,357.45 ccw(c464.47,375.5) 490,375.5 ; C4.1@490,352 v1(490,400) ; C9.1 603,225 v1(625,225) ; C9.1@578,209.72 ccw(c578,233.17) 594.59,216.59 ; v1(700,225) v1(815,225) ; C1.2@708.48,509.52 cw(c721.71,496.29) 721.71,515 cw(c721.71,533.71) C1.2@708.48,520.48 ; 719.59,498.41 ccw(c703,481.83) 703,505.28 cw(c703.1,453.11) 740,490 ; 730.93,487.07 cw(c713.86,470) v1@738,470 ; v1(740,470) v1@740,478 ; v1@742,470 cw(c778.21,470) 752.61,495.61 ; 743.46,493.46 cw(c772,464.93) 772,505.28 ccw(c772,481.83) 755.41,498.41 ; L1.2@766.52,509.52 ccw(c753.29,496.29) 753.29,515 ccw(c753.29,533.71) L1.2@766.52,520.48 ; v1(815,350) 862,350 C3.2 ; 833.9,350 ccw(c833.9,396.13) C3.2@866.52,363.51 ; C1.2@715,515 740,515 ; C1.2@715,515 C1.2 v1@740,478 ; C1.2@715,515 740,490 ; v1@740,478 740,483 ; 740,483 740,490 ; 740,483 L1.2 L1.2@765,515 ; 740,490 740,515 ; 740,490 L1.2@765,515 ; 740,515 L1.2@765,515
  Bottom Layer w16: v1(490,400) 555,465 v1@735,465 ; v1(625,225) v1(700,225) ; 723.1,465 ccw(c723.1,486.9) v1@738.59,471.41 ; v1(815,225) v1(815,350) 815,396.25 746.25,465 v1@745,465 ; v1@735,465 v1@745,465 ; v1@735,465 v1(740,470) v1@745,465
pads on no net: U1.4 U1.12 U1.13 U1.14 U1.15 U1.19 U1.20 U1.21 U1.26 U1.27 U1.28 U1.29 U1.30 X1.3

## Polygon pours and split planes (outlines as drawn)
GND on Bottom Layer "Top Layer-No Net" (hatched 45Degree grid 9 track 11, remove dead copper, pour order 4): -25,650 1800,650 1800,-25 -25,-25 -25,650
GND on Top Layer "Top Layer-No Net" (hatched 45Degree grid 9 track 11, remove dead copper, pour order 3): -25,650 1800,650 1800,-25 -25,-25 -25,650

## Keep-outs
Keep-Out Layer:
  lines w5: 0,0 1783.46,0 1783.46,618.11 0,618.11 0,0

## Other copper
Top Layer:
  region net GND: 318,565.5 318,600.5 32,600.5 32,565.5
  region net M3V3: 890,405 890,415 835,415 835,405
  region net M3V3: 895,410 891.46,413.54 886.46,408.54 890,405
  region net M3V3: 895,440 865,470 835,440 865,410
  region net M3V3: 895,410 895,440 835,440 835,410
  region net GND: 665,495 665,535 630,535 630,495
  region net GND: 665,495 650.5,509.5 640.5,499.5 655,485
  region net GND: 659.79,504.79 649.79,514.79 630,495 640,485
  region net GND: 655,485 655,500 640,500 640,485
  region net NetL1_1: 845,495 845,535 810,535 810,495
  region net NetL1_1: 845,495 827.5,512.5 810,495 827.5,477.5
  region net GND: 1425,15 1425,70 1150.65,70 1150.65,15
  region net GND: 775,33.79 775,90 645,90 645,33.79
  region net GND: 679.5,84.12 659.31,104.31 630.28,75.28 650.46,55.09
  region net GND: 540,110 540,233.22 480,233.22 480,110
  region net GND: 610,110 610,166.78 522.89,166.78 522.89,110
  region net GND: 610,110 587.5,132.5 573.04,118.04 595.54,95.54
  region net GND: 570.63,107.59 546.61,131.61 535,120 559.02,95.98
  region net GND: 730.7,79.3 700.93,109.07 680.33,88.47 710.1,58.69
  region net GND: 965,15 965,65.03 753.49,65.03 753.49,15
  region net GND: 1102,151.19 1046.89,206.3 1000.3,159.7 1055.4,104.6
  region net GND: 1064.22,140 1064.22,176.08 969.31,176.08 969.31,140
  region net GND: 1750,470 1750,590 1569.77,590 1569.77,470
  region net GND: 1755.66,42.53 1755.66,160 1572.52,160 1572.52,42.53
  region net GND: 993.84,245 993.84,507.07 925,507.07 925,245
  region net GND: 673.53,486.47 657.5,502.5 643.36,488.36 659.39,472.33
  region net GND: 650,481.78 650,485 640,485 640,481.78
  pour cut-out: 261,401.9 260,325 260,200 275,185 320,185 335,200 335,225 350,240 600,240 630,270 630,280 590,320 355,320 340,335 340,515 320,535 280,535 260,515
  pour cut-out: 435,618.11 435,555 876,553.9 910,555 910,618.11
  pour cut-out: 0,607.9 0,-10 270,-10 270,618.11 0,618.9 0,605.9 -2,603.9
  region net DC5V: 1510,205 1500,215 1340,215 1325,230 1325,265 1320,270 1290,270 1285,265 1285,155 1265,135 1120,135 1045,60 1045,50 1070,25 1085,25 1145,85 1330,85 1410,165 1500,165 1510,175
  region net M3V3: 1000,130 1025,105 1025,95 995,65 985,65 965,85 800,85 795,90 795,115 840,160 860,160 890,130
  region net NetL2_2: 590,272 617,272 626,281 625,285 590.12,284.88 590,285
Bottom Layer:
  pour cut-out: 0,618.9 0,-10 270,-10 270,618.11

## Silkscreen, mask and mechanical layers (free items; w line width, h text height)
Top Overlay:
  region: 743,400 743,442 728,442 728,400
  text "M3V" at 950,600 h34 r270
  text "V1.0" at 75,350 h31.5 r90
  text "JYD-HBC" at 75,100 h31.5 r90
  text "20-7-18" at 150,100 h31.5 r90
Bottom Overlay:
  text "GND" at 1700,410 h40
  text "TX" at 1700,320 h40
  text "RX" at 1700,240 h40
  text "5V" at 1700,150 h40
Mechanical 13:
  text "工艺要求:" at 55,1100 h100
  text "1> 板材:FR-4" at 55,900 h50
  text "4> 阻焊:顶层绿油" at 680,900 h50
  text "7> 板框: Keep-out 层" at 1355,900 h50
  text "2> 板厚:1.6   mm" at 55,800 h50
  text "5> 阻焊:底层绿油" at 680,800 h50
  text "3> 过孔:盖油" at 55,700 h50
  text "6> 字符:白色双面" at 680,700 h50

## Dimensions
0,0 to 1783.46,0 on Keep-Out Layer
0,0 to 0,618.11 on Keep-Out Layer